# EAGLE board Segundo (EAGLE 7.6.0)

Size 56.82 x 53.33 mm. Coordinates in mm from the lower left corner, seen from the top.
Outline: 0,0 56.82,0 56.82,53.33 0,53.33 0,0
Copper layers (1*16): Top 0.035mm / dielectric 1.5mm / Bottom 0.035mm
Design rules "default": minimum track width 10mil, minimum drill 24mil, track to track 8mil, track to pad 8mil, pad to pad 8mil, via to via 8mil, smd to smd 8mil, copper to edge 40mil, drill to drill 8mil, minimum pad ring 10mil, minimum via ring 8mil, stop-mask expansion 4mil, vias tented up to drill 0mil, thermal gap 10mil

## Footprints (pad centres in the part's own frame; a part is rotated, then mirrored left to right if it is on the bottom)
DC-POWER = drill 0.889 pad 2.54 octagon: + 0,2.54; - 0,-2.54
RADIAL-D11.36MM = drill 1.27 pad 1.905 square: + -2.54,0 | drill 1.27 pad 1.905: - 2.54,0
C5B2.5 = drill 0.813 pad 1.6 octagon: 1 -2.54,0; 2 2.54,0
LED5MM = drill 0.813 octagon: A -1.27,0; K 1.27,0
0207/10 = drill 0.813 octagon: 1 -5.08,0; 2 5.08,0
TL1105 = drill 1 pad 1.676: 1 -2.25,3.25; 2 2.25,3.25; 3 -2.25,-3.25; 4 2.25,-3.25
DIL08 = drill 0.813 pad 1.27: 1 -3.81,-3.81; 2 -1.27,-3.81; 3 1.27,-3.81; 4 3.81,-3.81; 5 3.81,3.81; 6 1.27,3.81; 7 -1.27,3.81; 8 -3.81,3.81

## Placement (x,y rotation side)
BAT1  [DC-POWER]  5,98.98 0 top  (outside the outline)
C1  100uF  [RADIAL-D11.36MM]  5,35.48 0 top
C2  10nF  [C5B2.5]  5,60.88 0 top  (outside the outline)
D1  [LED5MM]  5,86.28 0 top  (outside the outline)
R1  10k‎Ω  [0207/10]  5,22.78 0 top
R2  10k‎Ω  [0207/10]  5,124.38 0 top  (outside the outline)
R3  10k‎Ω  [0207/10]  5,48.18 0 top
R4  330‎Ω  [0207/10]  5,73.58 0 top  (outside the outline)
R5  4.7k‎Ω  [0207/10]  5,137.08 0 top  (outside the outline)
S1  [TL1105]  5,111.68 0 top  (outside the outline)
S2  [TL1105]  5,149.78 0 top  (outside the outline)
U1  [DIL08]  5,10.08 0 top

## Library data of the parts
BAT1 C1 C2 D1 R1-R5 S1 S2 U1 = AUTODESK_CIRCUITS_BREADBOARD

## Nets
N$1: C2.1 U1.5
N$2: R1.1 S1.1 U1.4
N$3: R4.1 U1.3
N$4: C1.+ R3.2 U1.6 U1.7
N$5: R2.1 R3.1
N$6: D1.A R4.2
N$7: BAT1.- C1.- C2.2 D1.K S1.4 S2.4 U1.1
N$8: R5.1 S2.1 U1.2
N$9: BAT1.+ R1.2 R2.2 R5.2 U1.8

## Tracks (layer width: path | path; a pad name or v marks a point on that pad's centre or on a via)
N$1  (1 unrouted)
N$2  (2 unrouted)
N$3  (1 unrouted)
N$4  (3 unrouted)
N$5  (1 unrouted)
N$6  (1 unrouted)
N$7  (6 unrouted)
N$8  (2 unrouted)
N$9  (4 unrouted)